# Altium PCB DC-DCBuckConv.PcbDoc (part 1 of 2)
Units mm, origin at the board's own origin, x right, y up, seen from the top; angles counter-clockwise.
Board outline 34.34 x 69.93 mm, 4 copper layers (Top Layer, GND, POWER, Bottom Layer), stack 1.369 mm thick; 52 components, 51 nets, 193 pads, 133 vias.
Unrouted connection lines stored in the file: 1.
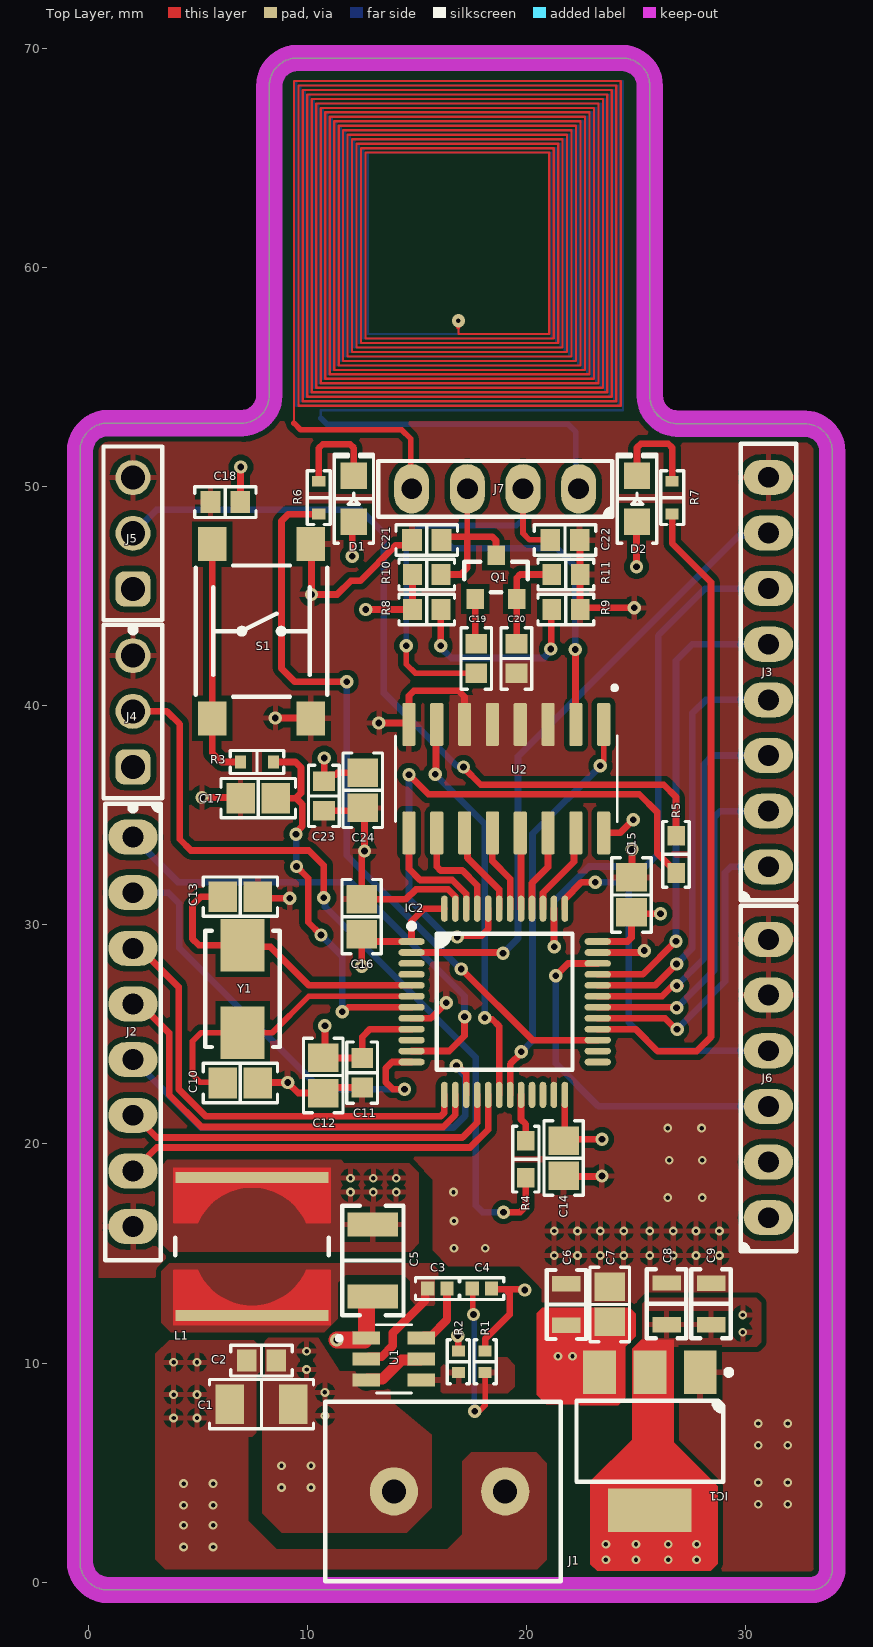
[diagram p0: Top Layer view]
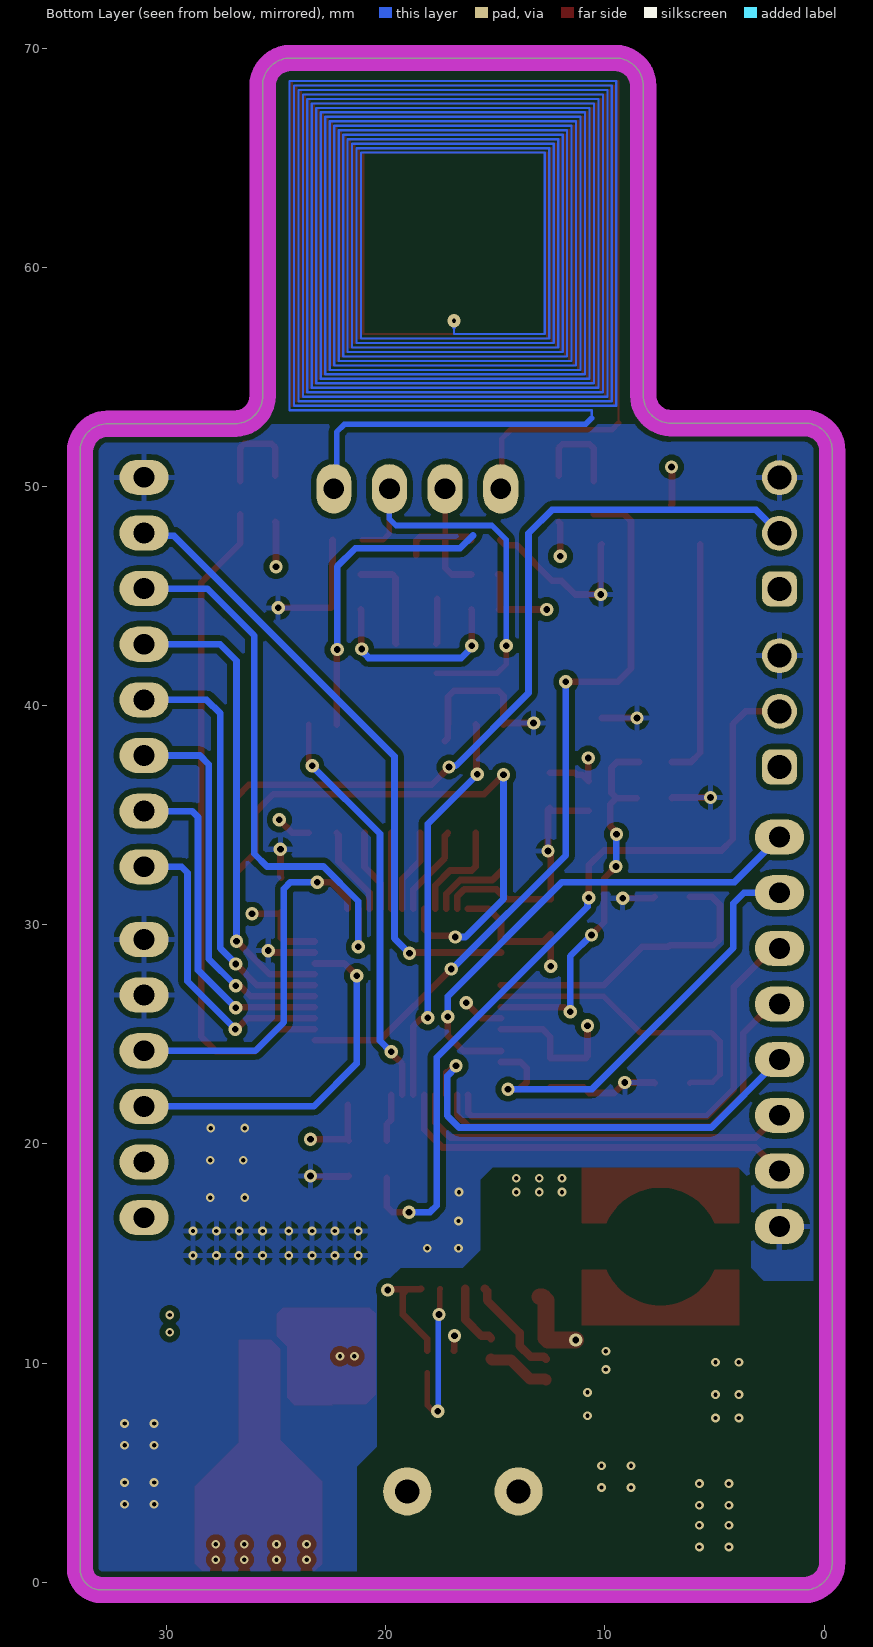
[diagram p1: Bottom Layer view, seen from below]
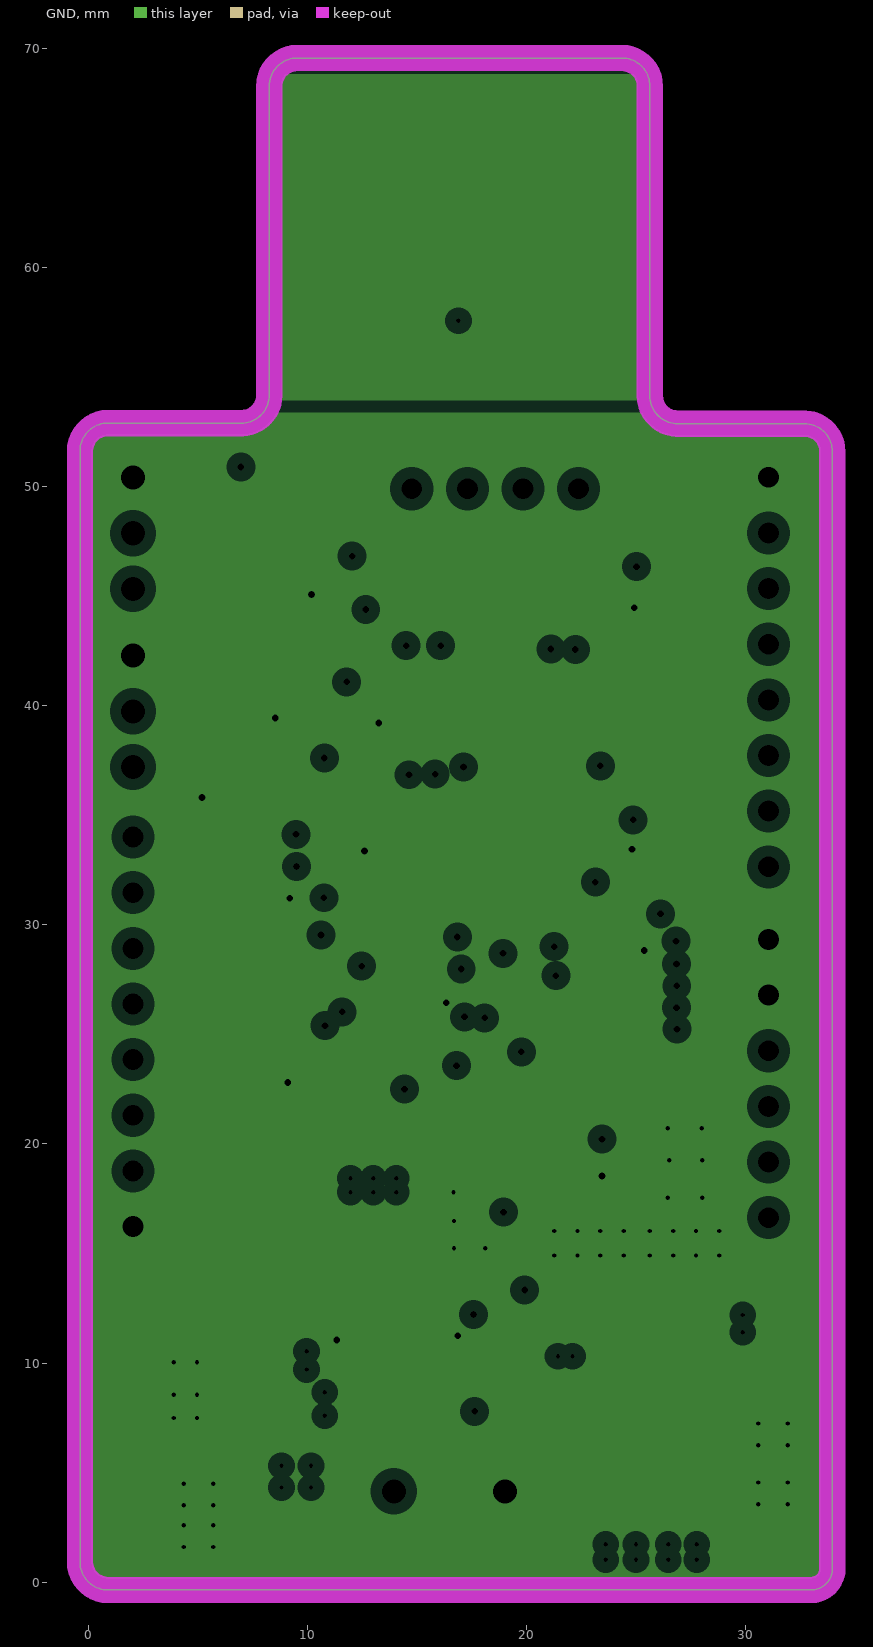
[diagram p2: GND, clearances drawn from the general rule]
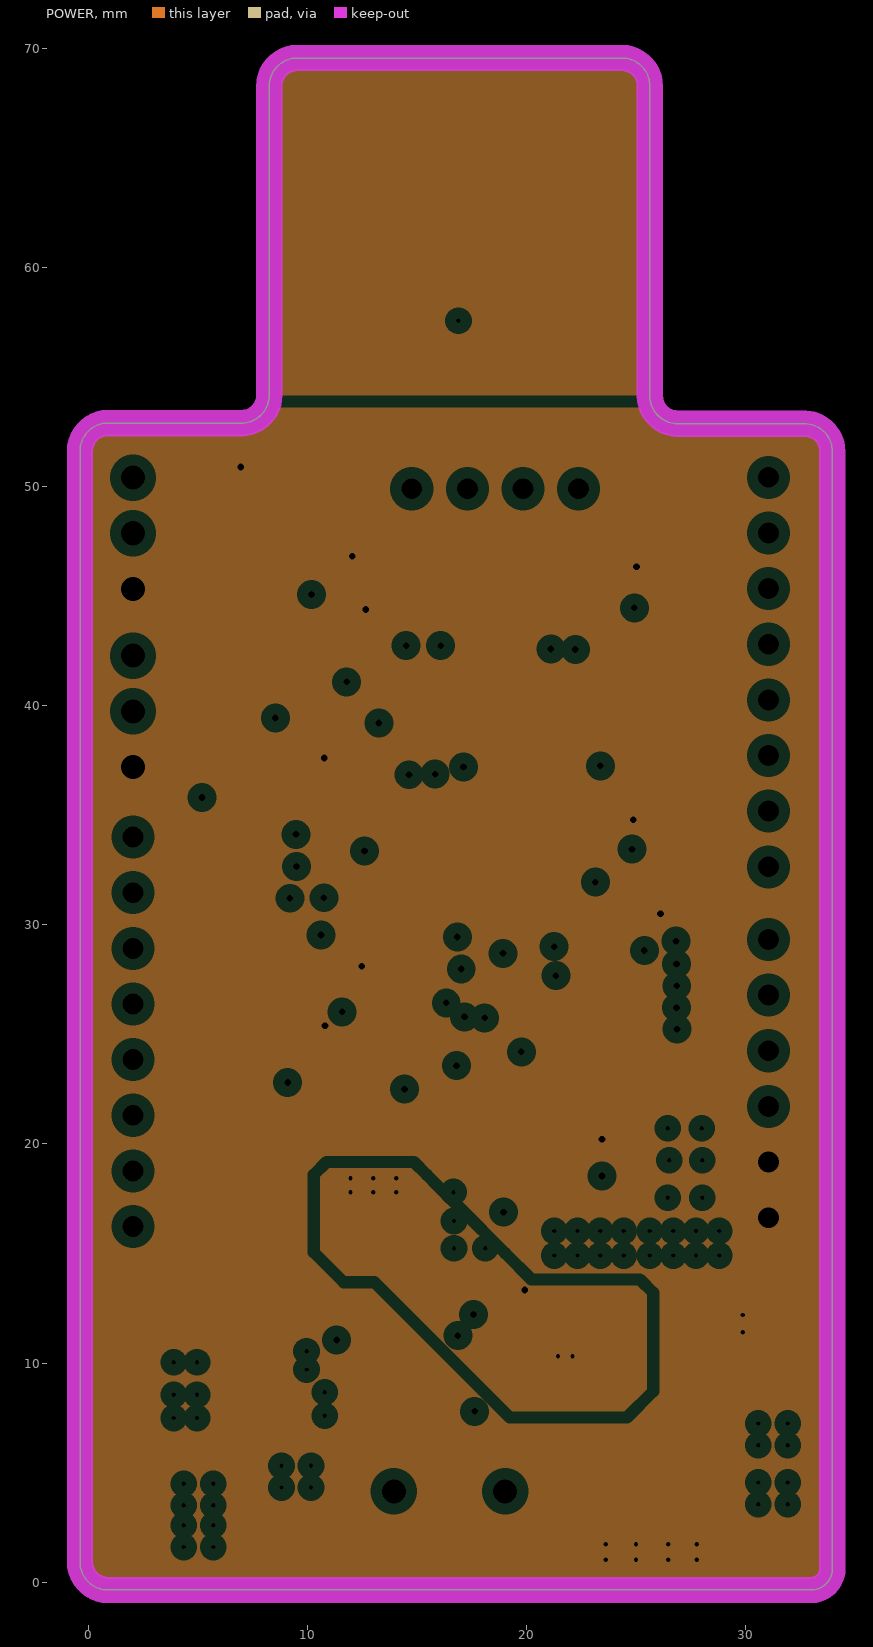
[diagram p3: POWER, clearances drawn from the general rule]

## Layer stack, top to bottom
Top Solder: solder mask 0.0254, SM-001, Dk 4
Top Layer: signal copper 0.035
Dielectric 1: prepreg 0.1295, PP-017, Dk 4.3
Dielectric 2: prepreg 0.1295, PP-017, Dk 4.3
GND: plane copper 0.035, net GND
Dielectric 3: core 0.7112, Core-039, Dk 4.8
POWER: plane copper 0.035, net (Multiple Nets)
Dielectric 4: prepreg 0.1295, PP-017, Dk 4.3
Dielectric 5: prepreg 0.1295, PP-017, Dk 4.3
Bottom Layer: signal copper 0.035
Bottom Solder: solder mask 0.0254, SM-001, Dk 4

## Board outline
-0.381,0.914 -0.381,51.638 cw(c0.889,51.638) 0.889,52.908 6.985,52.908 ccw(c6.985,54.178) 8.255,54.178 8.255,68.301 cw(c9.525,68.301) 9.525,69.571 24.359,69.571 cw(c24.359,68.301) 25.629,68.301 25.629,54.153 ccw(c26.899,54.153) 26.899,52.883 32.69,52.883 cw(c32.69,51.613) 33.96,51.613 33.96,0.61 cw(c32.995,0.61) 32.995,-0.356 0.889,-0.356 cw(c0.889,0.914)

## Design rules (kind name [scope] priority, off if disabled: settings)
Clearance [All] p1: gap=0.254 ignorepadtopadclearanceinfootprint=TRUE except(0: Arc-Hole Track-Hole SMDPad-Hole THPad-Hole Via-Hole Fill-Hole Poly-Hole Region-Hole Text-Hole; 0.127: Arc-Arc Arc-Track Arc-SMDPad Track-Track Track-SMDPad SMDPad-SMDPad Text-Text)
ComponentClearance [All] p1: gap=0.254 collisioncheckmode=3 verticalgap=0.025 showdistances=FALSE
MinimumSolderMaskSliver [All] p1: minsoldermaskwidth=0.12
PlaneClearance [All] p1: clearance=0.508
PlaneConnect [All] p1: planeconnectstyle=Relief reliefexpansion=0.508 reliefentries=4 reliefconductorwidth=0.254 reliefairgap=0.254
PolygonConnect [All] p1: connectstyle=Relief reliefconductorwidth=0.254 reliefentries=4 polygonreliefangle="90 Angle" airgapwidth=0.254
RoutingVias [All] p1: holewidth=0.305 width=0.61 viastyle="Through Hole" minholewidth=0.203 minwidth=0.406 maxholewidth=0.61 maxwidth=1.219
SilkToSilkClearance [All] p1: silktosilkclearance=0.127
SilkToSolderMaskClearance [IsPad] p1: minsilkscreentomaskgap=0.127 clearancetoexposedcopper=TRUE
SolderMaskExpansion [All] p1: expansion=0.102 istentingtop=FALSE
Width [All] p1: maxlimit=0.762 minlimit=0.254 preferedwidth=0.305 minimp=50.000000 maximp=50.000000 favimp=50.000000
24 further rules are at their usual default settings.

## Classes and differential pairs
component class Power: C1 C2 C3 C4 C5 C6 C7 C8 C9 IC1 J1 J2 J3 L1 R1 R2 SS U1
component class Measurement: C19 C20 C21 C22 C23 C24 J7 Q1 R8 R9 R10 R11 SS U2
component class Mcu: C10 C11 C12 C13 C14 C15 C16 C17 C18 D1 D2 IC2 J4 J5 J6 R3 R4 R5 R6 R7 S1 SS Y1

## Components (designator, comment, footprint, x,y, rotation, side; value= is the part's Value field where it differs from the comment)
C1 "2.2 µF" "CAP 1206_3216 - 0.8MM" 7.899,8.128 r0 top
C2 "0.1 µF" "CAP 0603_1608" 7.899,10.109 r0 top
C3 "0.1 µF" "CAP 0402_1005" 15.926,13.399 r0 top
C4 "3.9pF" "CAP 0402_1005" 17.958,13.399 r180 top
C5 "47 µF" "MURATA - GRM32E" 12.979,14.681 r90 top
C6 "10 µF" "MURATA GRM21B 0805_2012" 21.819,12.675 r270 top
C7 "0.1 µF" "CAP 0805_2012" 23.8,12.675 r270 top
C8 "10 µF" "MURATA GRM21B 0805_2012" 26.391,12.702 r270 top
C9 "100 µF" "MURATA GRM21B 0805_2012" 28.423,12.7 r270 top
C10 "20 pF" "CAP 0805_2012" 6.934,22.784 r180 top
C11 "1 µF" "CAP 0603_1608" 12.497,23.254 r90 top
C12 "0.1 µF" "CAP 0805_2012" 10.719,23.127 r90 top
C13 "20 pF" "CAP 0805_2012" 6.934,31.293 r180 top
C14 "0.1 µF" "CAP 0805_2012" 21.692,19.355 r90 top
C15 "0.1 µF" "CAP 0805_2012" 24.79,31.369 r270 top
C16 "0.1 µF" "CAP 0805_2012" 12.471,30.378 r270 top
C17 "0.1 µF" "CAP 0805_2012" 7.747,35.789 r180 top
C18 "1 µF" "CAP 0603_1608" 6.248,49.301 r0 top
C19 "0.1 µF" "CAP 0603_1608" 17.704,42.164 r90 top
C20 "0.1 µF" "CAP 0603_1608" 19.533,42.164 r90 top
C21 "2200pF" "CAP 0603_1608" 15.443,47.574 r0 top
C22 "2200pF" "CAP 0603_1608" 21.753,47.574 r0 top
C23 "1 µF" "CAP 0603_1608" 10.744,35.89 r90 top
C24 "0.1 µF" "CAP 0805_2012" 12.522,36.144 r90 top
D1 "Red" "LED 0805_2012 RED" 12.116,49.454 r90 top
D2 "Green" "LED 0805_2012 RED" 25.044,49.454 r90 top
IC1 "LD1117AS33TR" "ST SOT-223" 25.629,6.426 r270 top
IC2 "STM32F103CBT6" "ST LQFP-48 7X7MM" 18.999,26.492 r0 top
J1 "282837-2" "TE 282837-2" 16.485,4.14 r180 top
J2 "SSW-108-03-T-S" "SAMTEC SSW-108-03-T-S" 2.032,25.121 r270 top
J3 "SSW-108-03-T-S" "SAMTEC SSW-108-03-T-S" 31.039,41.544 r90 top
J4 "61300311121" "WURTH WE-PHD 61300311121" 2.032,39.751 r90 top
J5 "61300311121" "WURTH WE-PHD 61300311121" 2.032,47.879 r90 top
J6 "SSW-106-03-T-S" "SAMTEC SSW-106-03-T-S" 31.039,22.987 r90 top
J7 "SSW-104-03-T-S" "SAMTEC SSW-104-03-T-S" 18.567,49.911 r180 top
L1 "27 µH" "BOURNS SRR6028" 7.468,15.316 r90 top
Q1 "MMBT489LT1G" "ON SEMI SOT-23-3" 18.608,45.882 r90 top
R1 "100 kOhms" "YAGEO RES 0402_1005" 18.11,10.058 r90 top
R2 "13.7 kOhms" "YAGEO RES 0402_1005" 16.891,10.058 r90 top
R3 "390 Ohms" "KOA RES RK73 RN73 0603_1608" 7.696,37.44 r0 top
R4 "10 kOhms" "YAGEO RES 0603_1608" 19.964,19.304 r90 top
R5 "10 kOhms" "YAGEO RES 0603_1608" 26.822,33.223 r270 top
R6 "390 Ohms" "KOA RES RK73 RN73 0603_1608" 10.516,49.505 r90 top
R7 "390 Ohms" "KOA RES RK73 RN73 0603_1608" 26.645,49.505 r90 top
R8 "47.5 kOhms" "RES 0603_1608" 15.443,44.399 r180 top
R9 "10 kOhms" "RES 0603_1608" 21.793,44.399 r180 top
R10 "2.21 Ohms" "RES 0603_1608" 15.443,45.999 r180 top
R11 "475 Ohms" "RES 0603_1608" 21.793,45.999 r180 top
S1 "PTS645SM43SMTR92 LFS" "C&K PTS645" 7.899,43.409 r270 top
U1 "IC REG BUCK ADJ 2A SOT23" "SOT-23-6 Thin" 13.945,10.185 r0 top
U2 "IC COUNTER 4BIT SYNC BIN 16-SOIC" SOIC16 18.948,36.678 r270 top
Y1 "8 MHz" "NDK NX5032GA" 7.036,27.076 r270 top

## Footprints (in the part's own frame and the unit in brackets; to place one, negate y for a bottom-side part, rotate by r counter-clockwise, add the part's x,y. Pads: shape width x height; smd on the part's side, far side on the other; paste and mask are expansions set on the pad)
"BOURNS SRR6028" [mm] "Precision Wire Wound Inductor, 2-Leads, Body 6.80x6.80mm, IPC Medium Density"
  rect 0.5x7 smd: 1(-3.15,0) 2(3.15,0)
  Top Layer region: 3.6,3.6 1.1,3.6 1.1,2.5 1.4,2.4 1.7,2.1 1.9,2 2.1,1.7 2.3,1.4 2.5,1 2.6,0.7 2.7,0.3 2.7,0 3.6,0
  Top Layer region: 3.6,-3.6 1.1,-3.6 1.1,-2.5 1.4,-2.4 1.7,-2.1 1.9,-2 2.1,-1.7 2.3,-1.4 2.5,-1 2.6,-0.7 2.7,-0.3 2.7,0 3.6,0
  Top Layer region: -3.6,-3.6 -1.1,-3.6 -1.1,-2.5 -1.4,-2.4 -1.7,-2.1 -1.9,-2 -2.1,-1.7 -2.3,-1.4 -2.5,-1 -2.6,-0.7 -2.7,-0.3 -2.7,0 -3.6,0
  Top Layer region: -3.6,3.6 -1.1,3.6 -1.1,2.5 -1.4,2.4 -1.7,2.1 -1.9,2 -2.1,1.7 -2.3,1.4 -2.5,1 -2.6,0.7 -2.7,0.3 -2.7,0 -3.6,0
  Top Layer lines w0.1: -1.1,3.55 -1.1,2.5 ; 1.1,3.55 1.1,2.5 ; -1.1,2.5 ccw(c0,0) -2.731,0 ccw(c0,0) -1.1,-2.5 ; 1.1,2.5 cw(c0,0) 2.731,0 cw(c0,0) 1.1,-2.5 ; -1.1,-2.5 -1.1,-3.55 ; 1.1,-2.5 1.1,-3.527 1.1,-3.55
  silkscreen extent -0.4,-3.5 0.4,3.5, body extent -3.4,-3.4 3.4,3.4, height 2.8
"C&K PTS645" [mm] "T-Switch, 4-leads, body 6x6mm, C&K PTS645SM43SMTR92 LFS"
  rect 1.55x1.3 smd mask+0.1: 1(-3.975,2.25) 2(3.975,2.25) 3(-3.975,-2.25) 4(3.975,-2.25)
  silkscreen extent -3,-3 3,3, body extent -4.5,-3 4.5,3, height 4.4
"CAP 0402_1005" [mm] "Chip Capacitor, 2-Leads, Body 1.02x0.51mm, IPC Medium Density"
  rect 0.6x0.64 smd: 1(-0.44,0) 2(0.44,0)
  silkscreen extent -1,-0.5 1,0.5, body extent -0.5,-0.26 0.5,0.26, height 0.52
"CAP 0603_1608" [mm] "Chip Capacitor, 2-Leads, Body 1.60x0.80mm, IPC Medium Density"
  rect 0.9x1 smd: 1(-0.675,0) 2(0.675,0)
  silkscreen extent -1.4,-0.7 1.4,0.7, body extent -0.8,-0.41 0.8,0.41, height 0.82
"CAP 0805_2012" [mm] "Chip Capacitor, 2-Leads, Body 2.00x1.20mm, IPC Medium Density"
  rect 1.3x1.4 smd: 1(-0.8,0) 2(0.8,0)
  silkscreen extent -1.7,-0.9 1.7,0.9, body extent -1,-0.64 1,0.64, height 1.26
"CAP 1206_3216 - 0.8MM" [mm] "Chip Capacitor, 2-Leads, Body 3.25x1.60mm, IPC Medium Density"
  rect 1.3x1.8 smd: 1(-1.45,0) 2(1.45,0)
  silkscreen extent -2.37,-1.12 2.37,1.12, body extent -1.6,-0.8 1.6,0.8, height 0.8
"KOA RES RK73 RN73 0603_1608" [mm] "Chip Resistor, 2-Leads, Body 1.60x0.80mm"
  rect 0.5x0.6 smd: 1(-0.75,0) 2(0.75,0)
  silkscreen extent -1.22,-0.52 1.22,0.52, body extent -0.8,-0.4 0.8,0.4, height 0.45
"LED 0805_2012 RED" [mm] "Chip Diode, 2-Leads, Body 2.00x1.25mm, IPC Medium Density"
  rect 1.2x1.2 smd: 1(-1.05,0) 2(1.05,0)
  silkscreen extent -2.03,-0.9 2.03,0.9, body extent -1,-0.62 1,0.63, height 0.9
"MURATA - GRM32E" [mm] "Chip Capacitor, 2-Leads, Body 3.20x2.50mm"
  rect 1.1x2.3 smd: 1(-1.65,0) 2(1.65,0)
  silkscreen extent -2.5,-1.4 2.5,1.4, body extent -1.6,-1.25 1.6,1.25, height 2.5
"MURATA GRM21B 0805_2012" [mm] "Chip Capacitor, 2-Leads, Body 2.00x1.25mm"
  rect 0.7x1.3 smd: 1(-0.95,0) 2(0.95,0)
  silkscreen extent -1.58,-0.9 1.58,0.9, body extent -1,-0.63 1,0.63, height 1.25
"NDK NX5032GA" [mm] "Crystal, 2-Leads, Body 5.00x3.20mm, IPC Medium Density"
  rect 2.4x2 smd: 1(-2,0) 2(2,0)
  silkscreen extent -2.65,-1.7 2.65,1.7, body extent -2.5,-1.6 2.5,1.6, height 1.2
"ON SEMI SOT-23-3" [mm] "SOT23, 3-Leads, Body 2.90x2.40mm, Pitch 0.95mm, IPC Medium Density"
  rect 0.9x0.8 smd: 1(-1,0.95) 2(-1,-0.95) 3(1,0)
  silkscreen extent -0.7,-1.45 0.7,1.45, body extent -1.16,-1.45 1.16,1.45, height 1
"RES 0603_1608" [mm] "Chip Resistor, 2-Leads, Body 1.60x0.80mm, IPC Medium Density"
  rect 0.85x0.95 smd: 1(-0.65,0) 2(0.65,0)
  silkscreen extent -1.27,-0.7 1.27,0.7, body extent -0.8,-0.4 0.8,0.4, height 0.45
"SAMTEC SSW-104-03-T-S" [mm] "Pin Header, pitch 2.54 mm, THT, Vertical, single row, 3p"
  oval 1.6x2.25 hole 0.95: 1(-3.81,0) 2(-1.27,0) 3(1.27,0) 4(3.81,0)
  silkscreen extent -5.34,-1.27 5.34,1.27, body extent -5.33,-1.21 5.33,1.21, height 8.51
"SAMTEC SSW-106-03-T-S" [mm]
  oval 1.6x2.25 hole 0.95: 1(-6.35,0) 2(-3.81,0) 3(-1.27,0) 4(1.27,0) 5(3.81,0) 6(6.35,0)
  silkscreen extent -7.88,-1.27 7.88,1.27, body extent -7.87,-1.21 7.87,1.21, height 8.51
"SAMTEC SSW-108-03-T-S" [mm]
  oval 1.6x2.25 hole 0.95: 1(-8.89,0) 2(-6.35,0) 3(-3.81,0) 4(-1.27,0) 5(1.27,0) 6(3.81,0) 7(6.35,0) 8(8.89,0)
  silkscreen extent -10.42,-1.27 10.42,1.27, body extent -10.41,-1.21 10.41,1.21, height 8.51
SOIC16 [mm]
  rrect25% 1.97x0.6 smd: 1(-2.475,4.572) 2(-2.475,3.302) 3(-2.475,2.032) 4(-2.475,0.762) 5(-2.475,-0.508) 6(-2.475,-1.778) 7(-2.475,-3.048) 8(-2.475,-4.318) 9(2.475,-4.318) 10(2.475,-3.048) 11(2.475,-1.778) 12(2.475,-0.508) 13(2.475,0.762) 14(2.475,2.032) 15(2.475,3.302) 16(2.475,4.572)
  silkscreen extent -4.24,-4.94 1.95,5.19, body extent -3,-4.83 3,5.07, height 1.75
"SOT-23-6 Thin" [mm]
  rect 1.25x0.59 smd: 1(-1.255,0.95) 2(-1.255,0) 3(-1.255,-0.95) 4(1.255,-0.95) 5(1.255,0) 6(1.255,0.95)
  silkscreen extent -2.6,-1.56 0.8,1.56, body extent -1.4,-1.45 1.4,1.45, height 1.1
"ST LQFP-48 7X7MM" [mm] "LQFP, 48-Leads, Body 7.00x7.00mm, Pitch 0.50mm, IPC Medium Density"
  oval 1.2x0.3 smd: 1(-4.25,2.75) 2(-4.25,2.25) 3(-4.25,1.75) 4(-4.25,1.25) 5(-4.25,0.75) 6(-4.25,0.25) 7(-4.25,-0.25) 8(-4.25,-0.75) 9(-4.25,-1.25) 10(-4.25,-1.75) 11(-4.25,-2.25) 12(-4.25,-2.75) 25(4.25,-2.75) 26(4.25,-2.25) 27(4.25,-1.75) 28(4.25,-1.25) 29(4.25,-0.75) 30(4.25,-0.25) 31(4.25,0.25) 32(4.25,0.75) 33(4.25,1.25) 34(4.25,1.75) 35(4.25,2.25) 36(4.25,2.75)
  oval 0.3x1.2 smd: 13(-2.75,-4.25) 14(-2.25,-4.25) 15(-1.75,-4.25) 16(-1.25,-4.25) 17(-0.75,-4.25) 18(-0.25,-4.25) 19(0.25,-4.25) 20(0.75,-4.25) 21(1.25,-4.25) 22(1.75,-4.25) 23(2.25,-4.25) 24(2.75,-4.25) 37(2.75,4.25) 38(2.25,4.25) 39(1.75,4.25) 40(1.25,4.25) 41(0.75,4.25) 42(0.25,4.25) 43(-0.25,4.25) 44(-0.75,4.25) 45(-1.25,4.25) 46(-1.75,4.25) 47(-2.25,4.25) 48(-2.75,4.25)
  silkscreen extent -4.37,-3.1 3.1,3.57, body extent -4.51,-4.51 4.51,4.51, height 1.55
"ST SOT-223" [mm] "SOT223, 4-Leads, Body 6.50x7.00mm (avg), Pitch 2.30mm, IPC Medium Density"
  rect 2x1.5 smd: 1(-3.15,2.3) 2(-3.15,0) 3(-3.15,-2.3)
  rect 2x3.8 smd: 4(3.15,0)
  silkscreen extent -3.27,-3.35 1.85,3.73, body extent -3.52,-3.25 3.5,3.25, height 1.8
"TE 282837-2" [mm] "Wire to Board Terminal Block Horizontal with Board, 2 Postions, Body 10.76x8.2 mm, Pitch 5.08mm"
  round 2.2 hole 1.1: 1(-2.54,0) 2(2.54,0)
  silkscreen extent -5.08,-4.1 5.68,4.1, body extent -5.08,-4.1 5.68,4.1, height 10.3
"WURTH WE-PHD 61300311121" [mm] "Pin Header, pitch 2.54 mm, THT, Vertical, single row, 3p"
  rrect50% 1.6x1.6 hole 1.1: 1(-2.54,0)
  round 1.6 hole 1.1: 2(0,0) 3(2.54,0)
  silkscreen extent -4.53,-1.35 3.96,1.35, body extent -3.81,-1.27 3.81,1.27, height 8.57
"YAGEO RES 0402_1005" [mm] "Chip Resistor, 2-Leads, Body 1.0x0.5mm"
  rect 0.5x0.6 smd: 1(-0.5,0) 2(0.5,0)
  silkscreen extent -1,-0.51 1,0.51, body extent -0.5,-0.25 0.5,0.25, height 0.35
"YAGEO RES 0603_1608" [mm] "Chip Resistor, 2-Leads, Body 1.60x0.80mm"
  rect 0.9x0.8 smd: 1(-0.85,0) 2(0.85,0)
  silkscreen extent -1.5,-0.6 1.5,0.6, body extent -0.8,-0.4 0.8,0.4, height 0.45

## Part data
C1: library part CL31B225KBHVPNE, "CAP CER 2.2UF 50V X7R 1206", Device Package="1206 (3216 Metric)", manufacturer="Samsung Electro-Mechanics", Operating Temperature="-55°C ~ 125°C", Ratings=AEC-Q200, Supplier Part Number 1=1276-6735-1-ND, Temperature Coefficient=X7R, Tolerance=±10%, Voltage - Rated=50V, Applications=Automotive, Capacitance="2.2 µF", componentlink1description=Datasheet, componentlink1url=http://www.samsungsem.com/kr/support/product-search/mlcc/CL31B225KBHVPNE.jsp, componentlink2description="DigiKey Link", componentlink2url=https://www.digikey.com/en/products/detail/samsung-electro-mechanics/CL31B225KBHVPNE/5961219, lastupdated="4.06.2024 19:10:40", Lifecycle Status=Active, Minimum Order=1, Mounting Type="Surface Mount, MLCC", Package / Case="1206 (3216 Metric)", packaging=TapeAndReel, Part Number=CL31B225KBHVPNE, Part Status=Active, partid=20106, price=0.05, series=CL, Size / Dimension="0.126\" L x 0.063\" W (3.20mm x 1.60mm)", Supplier 1=DigiKey, Thickness (Max)="0.071\" (1.80mm)"
C2: library part C0603X104K5RAC3316, "CAP CER 0603 0.1UF 50V X7R 10%", Device Package="0603 (1608 Metric)", manufacturer=KEMET, Operating Temperature="-55°C ~ 125°C", Ratings=AEC-Q200, Supplier Part Number 1=399-C0603X104K5RAC3316CT-ND, Temperature Coefficient=X7R, Tolerance=±10%, Voltage - Rated=50V, Applications="Automotive, Boardflex Sensitive", Capacitance="0.1 µF", componentlink1description=Datasheet, componentlink1url=https://api.kemet.com/component-edge/download/datasheet/C0603X104K5RAC3316.pdf, componentlink2description="DigiKey Link", componentlink2url=https://www.digikey.com/en/products/detail/kemet/C0603X104K5RAC3316/10315788, Features="Soft Termination", lastupdated="9.02.2024 20:10:19", Lifecycle Status=Active, Minimum Order=1, Mounting Type="Surface Mount, MLCC", Package / Case="0603 (1608 Metric)", packaging=TapeAndReel, Part Number=C0603X104K5RAC3316, Part Status=Active, partid=11116, price=0.02, series="SMD Auto X7R VW80808", Size / Dimension="0.063\" L x 0.031\" W (1.60mm x 0.80mm)", Supplier 1=DigiKey, Thickness (Max)="0.037\" (0.95mm)"
C3: library part C0402C104K4RECAUTO, "CAP CER 0402 0.1UF 16V X7R 10%", Device Package="0402 (1005 Metric)", manufacturer=KEMET, Operating Temperature="-55°C ~ 125°C", Ratings=AEC-Q200, Supplier Part Number 1=399-17167-1-ND, Temperature Coefficient=X7R, Tolerance=±10%, Voltage - Rated=16V, Applications="Automotive, ESD Protection", Capacitance="0.1 µF", componentlink1description=Datasheet, componentlink1url=https://api.kemet.com/component-edge/download/datasheet/C0402C104K4RECAUTO.pdf, componentlink2description="DigiKey Link", componentlink2url=https://www.digikey.com/en/products/detail/kemet/C0402C104K4RECAUTO/8563695, lastupdated="9.02.2024 20:04:38", Lifecycle Status=Active, Minimum Order=1, Mounting Type="Surface Mount, MLCC", Package / Case="0402 (1005 Metric)", packaging=TapeAndReel, Part Number=C0402C104K4RECAUTO, Part Status=Active, partid=1731, price=0.01, series="ESD SMD Auto X7R", Size / Dimension="0.039\" L x 0.020\" W (1.00mm x 0.50mm)", Supplier 1=DigiKey, Thickness (Max)="0.022\" (0.55mm)"
C4: library part 04023U3R9BAT2A, "CAP CER 3.9PF 25V NP0 0402", Device Package="0402 (1005 Metric)", manufacturer="AVX Corporation", Operating Temperature="-55°C ~ 125°C", Supplier Part Number 1=478-11759-1-ND, Temperature Coefficient="C0G, NP0", Tolerance=±0.1pF, Voltage - Rated=25V, Applications="RF, Microwave, High Frequency", Capacitance=3.9pF, componentlink1description=Datasheet, componentlink1url=http://datasheets.avx.com/U-Series.pdf, componentlink2description="DigiKey Link", componentlink2url=http://digikey.com/product-detail/en/avx-corporation/04023U3R9BAT2A/478-11759-1-ND/8573395, Features="Ultra Low ESR", lastupdated="8.02.2022 12:26:42", Lifecycle Status=Active, Minimum Order=1, Mounting Type="Surface Mount, MLCC", Package / Case="0402 (1005 Metric)", packaging=TapeAndReel, Part Number=04023U3R9BAT2A, Part Status=Active, partid=11132, price=0.03, series=U, Size / Dimension="0.039\" L x 0.020\" W (1.00mm x 0.50mm)", Supplier 1=DigiKey, Thickness (Max)="0.022\" (0.55mm)"
C5: library part GRM32EC81C476KE15L, "CAP CER 47UF 16V X6S 1210", Device Package="1210 (3225 Metric)", manufacturer="Murata Electronics", Operating Temperature="-55°C ~ 105°C", Supplier Part Number 1=490-10531-1-ND, Temperature Coefficient=X6S, Tolerance=±10%, Voltage - Rated=16V, Applications="General Purpose", Capacitance="47 µF", componentlink1description=Datasheet, componentlink1url=https://search.murata.co.jp/Ceramy/image/img/A01X/G101/ENG/GRM32EC81C476KE15-01.pdf, componentlink2description="DigiKey Link", componentlink2url=https://www.digikey.com/en/products/detail/murata-electronics/GRM32EC81C476KE15L/5027615, lastupdated="27.08.2024 14:53:22", Lifecycle Status=Active, Minimum Order=1, Mounting Type="Surface Mount, MLCC", Package / Case="1210 (3225 Metric)", packaging=TapeAndReel, Part Number=GRM32EC81C476KE15L, Part Status=Active, partid=23627, price=0.12, series=GRM, Size / Dimension="0.126\" L x 0.098\" W (3.20mm x 2.50mm)", Supplier 1=DigiKey, Thickness (Max)="0.106\" (2.70mm)"
C6 C8: library part GRM21BR61H106KE43L, "CAP CER 10UF 50V X5R 0805", Device Package="0805 (2012 Metric)", manufacturer="Murata Electronics", Operating Temperature="-55°C ~ 85°C", Supplier Part Number 1=490-18663-1-ND, Temperature Coefficient=X5R, Tolerance=±10%, Voltage - Rated=50V, Applications="Mobile Devices Only", Capacitance="10 µF", componentlink1description=Datasheet, componentlink1url=https://search.murata.co.jp/Ceramy/image/img/A01X/G101/ENG/GRM21BR61H106KE43-01A.pdf, componentlink2description="DigiKey Link", componentlink2url=https://www.digikey.com/en/products/detail/murata-electronics/GRM21BR61H106KE43L/10326316, lastupdated="27.08.2024 09:29:56", Lifecycle Status=Active, Minimum Order=1, Mounting Type="Surface Mount, MLCC", Package / Case="0805 (2012 Metric)", packaging=TapeAndReel, Part Number=GRM21BR61H106KE43L, Part Status=Active, partid=39284, price=0.05, series=GRM, Size / Dimension="0.079\" L x 0.049\" W (2.00mm x 1.25mm)", Supplier 1=DigiKey, Thickness (Max)="0.057\" (1.45mm)"
C7 C12 C14 C15 C16 C17 C24: library part C0805C104J1RECAUTO, "CAP CER 0805 0.1UF 100V X7R 5%", Device Package="0805 (2012 Metric)", manufacturer=KEMET, Operating Temperature="-55°C ~ 125°C", Ratings=AEC-Q200, Supplier Part Number 1=399-C0805C104J1RECAUTOCT-ND, Temperature Coefficient=X7R, Tolerance=±5%, Voltage - Rated=100V, Applications="Automotive, ESD Protection", Capacitance="0.1 µF", componentlink1description=Datasheet, componentlink1url=https://api.kemet.com/component-edge/download/datasheet/C0805C104J1RECAUTO.pdf, componentlink2description="DigiKey Link", componentlink2url=https://www.digikey.com/en/products/detail/kemet/C0805C104J1RECAUTO/8646637, lastupdated="9.02.2024 20:15:06", Lifecycle Status=Active, Minimum Order=1, Mounting Type="Surface Mount, MLCC", Package / Case="0805 (2012 Metric)", packaging=TapeAndReel, Part Number=C0805C104J1RECAUTO, Part Status=Active, partid=31979, price=0.05, series="ESD SMD Auto X7R", Size / Dimension="0.079\" L x 0.049\" W (2.00mm x 1.25mm)", Supplier 1=DigiKey, Thickness (Max)="0.043\" (1.10mm)"
C9: library part GRM21BR60J107ME15K, "CAP CER 100UF 6.3V X5R 0805", Device Package="0805 (2012 Metric)", manufacturer="Murata Electronics", Operating Temperature="-55°C ~ 85°C", Supplier Part Number 1=490-GRM21BR60J107ME15KCT-ND, Temperature Coefficient=X5R, Tolerance=±20%, Voltage - Rated=6.3V, Applications="General Purpose", Capacitance="100 µF", componentlink1description=Datasheet, componentlink1url=https://search.murata.co.jp/Ceramy/image/img/A01X/G101/ENG/GRM21BR60J107ME15-01A.pdf, componentlink2description="DigiKey Link", componentlink2url=https://www.digikey.com/en/products/detail/murata-electronics/GRM21BR60J107ME15K/9887675, lastupdated="27.08.2024 09:29:54", Lifecycle Status=Active, Minimum Order=1, Mounting Type="Surface Mount, MLCC", Package / Case="0805 (2012 Metric)", packaging=TapeAndReel, Part Number=GRM21BR60J107ME15K, Part Status=Active, partid=39832, price=0.39, series=GRM, Size / Dimension="0.079\" L x 0.049\" W (2.00mm x 1.25mm)", Supplier 1=DigiKey, Thickness (Max)="0.057\" (1.45mm)"
C10 C13: library part C0805C200F5GAC7800, "CAP CER SMD 0805 20PF 50V 1% COG", Device Package="0805 (2012 Metric)", manufacturer=KEMET, Operating Temperature="-55°C ~ 125°C", Supplier Part Number 1=399-17623-1-ND, Temperature Coefficient="C0G, NP0", Tolerance=±1%, Voltage - Rated=50V, Applications="General Purpose", Capacitance="20 pF", componentlink1description=Datasheet, componentlink1url=https://api.kemet.com/component-edge/download/datasheet/C0805C200F5GAC7800.pdf, componentlink2description="DigiKey Link", componentlink2url=https://www.digikey.com/en/products/detail/kemet/C0805C200F5GAC7800/8572458, Features="Low ESL", lastupdated="9.02.2024 20:15:38", Lifecycle Status=Active, Minimum Order=1, Mounting Type="Surface Mount, MLCC", Package / Case="0805 (2012 Metric)", packaging=TapeAndReel, Part Number=C0805C200F5GAC7800, Part Status=Active, partid=13880, price=0.32, series="SMD Comm C0G", Size / Dimension="0.079\" L x 0.049\" W (2.00mm x 1.25mm)", Supplier 1=DigiKey, Thickness (Max)="0.035\" (0.88mm)"
C11 C18 C23: library part C0603X105M4RAC7867, "CAP CER 0603 1UF 16V X7R 20%", Device Package="0603 (1608 Metric)", manufacturer=KEMET, Operating Temperature="-55°C ~ 125°C", Supplier Part Number 1=399-17716-1-ND, Temperature Coefficient=X7R, Tolerance=±20%, Voltage - Rated=16V, Applications="Boardflex Sensitive", Capacitance="1 µF", componentlink1description=Datasheet, componentlink1url=https://api.kemet.com/component-edge/download/datasheet/C0603X105M4RAC7867.pdf, componentlink2description="DigiKey Link", componentlink2url=https://www.digikey.com/en/products/detail/kemet/C0603X105M4RAC7867/8635843, Features="Soft Termination", lastupdated="9.02.2024 20:10:28", Lifecycle Status=Active, Minimum Order=1, Mounting Type="Surface Mount, MLCC", Package / Case="0603 (1608 Metric)", packaging=TapeAndReel, Part Number=C0603X105M4RAC7867, Part Status=Active, partid=3937, price=0.05, series="SMD Comm X7R Flex", Size / Dimension="0.063\" L x 0.031\" W (1.60mm x 0.80mm)", Supplier 1=DigiKey, Thickness (Max)="0.037\" (0.95mm)"
C19 C20: library part CML0603Y5V104ZT50V, "CAP, Y5V, 0603, 0.1UF, +80/-20%,", Device Package="0603 (1608 Metric)", manufacturer="Stackpole Electronics Inc", Operating Temperature="-30°C ~ 85°C", Supplier Part Number 1=738-CML0603Y5V104ZT50VCT-ND, Temperature Coefficient="Y5V (F)", Tolerance="-20%, +80%", Voltage - Rated=50V, Applications="General Purpose", Capacitance="0.1 µF", componentlink1description=Datasheet, componentlink1url=http://www.seielect.com/Catalog/SEI-CML.PDF, componentlink2description="DigiKey Link", componentlink2url=https://www.digikey.com/en/products/detail/stackpole-electronics-inc/CML0603Y5V104ZT50V/10660018, lastupdated="9.02.2024 20:10:13", Lifecycle Status=Active, Minimum Order=1, Mounting Type="Surface Mount, MLCC", Package / Case="0603 (1608 Metric)", packaging=TapeAndReel, Part Number=CML0603Y5V104ZT50V, Part Status=Active, partid=26307, price=0.01, series=CML, Size / Dimension="0.063\" L x 0.031\" W (1.60mm x 0.80mm)", Supplier 1=DigiKey, Thickness (Max)="0.035\" (0.89mm)"
C21 C22: library part 06031C222KAT4A, "CAP CER 2200PF 100V X7R 0603", Device Package="0603 (1608 Metric)", manufacturer="AVX Corporation", Operating Temperature="-55°C ~ 125°C", Supplier Part Number 1=478-12673-1-ND, Temperature Coefficient=X7R, Tolerance=±10%, Voltage - Rated=100V, Applications="General Purpose", Capacitance=2200pF, componentlink1description=Datasheet, componentlink1url=http://datasheets.avx.com/X7RDielectric.pdf, componentlink2description="DigiKey Link", componentlink2url=http://digikey.com/product-detail/en/avx-corporation/06031C222KAT4A/478-12673-1-ND/9949211, lastupdated="2.09.2020 01:03:32", Lifecycle Status=Active, Minimum Order=1, Mounting Type="Surface Mount, MLCC", Package / Case="0603 (1608 Metric)", packaging=TapeAndReel, Part Number=06031C222KAT4A, Part Status=Active, partid=4525, price=0.02, series=-, Size / Dimension="0.063\" L x 0.032\" W (1.60mm x 0.81mm)", Supplier 1=DigiKey, Thickness (Max)="0.035\" (0.90mm)"
D1: library part CMD17-21SRC/TR8, "LED RED CLEAR 0805 SMD", Current - Test=20mA, Device Package="0805 (2012 Metric)", Lens Color=Colorless, manufacturer="Visual Communications Company - VCC", Millicandela Rating=21mcd, Supplier Device Package=0805, Supplier Part Number 1=L62411CT-ND, Voltage - Forward (Vf) (Typ)=1.7V, Color=Red, componentlink1description=Datasheet, componentlink1url=https://vcclite.com/wp-content/uploads/wpallimport/files/files/CMD1721Seriesver3.pdf, componentlink2description="DigiKey Link", componentlink2url=https://www.digikey.com/en/products/detail/visual-communications-company-vcc/CMD17-21SRC-TR8/254848, Configuration=Standard, Height (Max)=1.20mm, lastupdated="3.06.2024 20:00:06", Lens Size="1.40mm x 1.25mm", Lens Style="Rectangle with Flat Top", Lens Transparency=Clear, Lifecycle Status=Active, Minimum Order=1, Mounting Type="Surface Mount", Package / Case="0805 (2012 Metric)", packaging=TapeAndReel, Part Number=CMD17-21SRC/TR8, Part Status=Active, partid=369, price=0.30, series=CMD17-21, Size / Dimension="2.00mm L x 1.25mm W", Supplier 1=DigiKey, Viewing Angle=140°, Wavelength - Peak=660nm
D2: library part CMD17-21SRC/TR8, "LED RED CLEAR 0805 SMD", Color=Red, Current - Test=20mA, Device Package="0805 (2012 Metric)", Lens Color=Colorless, manufacturer="Visual Communications Company - VCC", Millicandela Rating=21mcd, Supplier Device Package=0805, Supplier Part Number 1=L62411CT-ND, Voltage - Forward (Vf) (Typ)=1.7V, componentlink1description=Datasheet, componentlink1url=https://vcclite.com/wp-content/uploads/wpallimport/files/files/CMD1721Seriesver3.pdf, componentlink2description="DigiKey Link", componentlink2url=https://www.digikey.com/en/products/detail/visual-communications-company-vcc/CMD17-21SRC-TR8/254848, Configuration=Standard, Height (Max)=1.20mm, lastupdated="3.06.2024 20:00:06", Lens Size="1.40mm x 1.25mm", Lens Style="Rectangle with Flat Top", Lens Transparency=Clear, Lifecycle Status=Active, Minimum Order=1, Mounting Type="Surface Mount", Package / Case="0805 (2012 Metric)", packaging=TapeAndReel, Part Number=CMD17-21SRC/TR8, Part Status=Active, partid=369, price=0.30, series=CMD17-21, Size / Dimension="2.00mm L x 1.25mm W", Supplier 1=DigiKey, Viewing Angle=140°, Wavelength - Peak=660nm
IC1: "IC REG LINEAR 3.3V 1A SOT223", Current - Output=1A, Current - Quiescent (Iq)="10 mA", manufacturer=STMicroelectronics, Operating Temperature="0°C ~ 125°C", Package / Case="TO-261-4, TO-261AA", Supplier Device Package=SOT-223, Supplier Part Number 1=497-1228-1-ND, Voltage - Output (Min/Fixed)=3.3V, Voltage - Input (Max)=15V, Voltage Dropout (Max)="1.3V @ 1A", componentlink1description=Datasheet, componentlink1url=http://www.st.com/content/ccc/resource/technical/document/datasheet/a5/c3/3f/c9/2b/15/40/49/CD00002116.pdf/files/CD00002116.pdf/jcr:content/translations/en.CD00002116.pdf, componentlink2description="DigiKey Link", componentlink2url=https://www.digikey.com/en/products/detail/stmicroelectronics/LD1117AS33TR/585752, lastupdated="3.06.2024 20:14:21", Lifecycle Status=Active, Minimum Order=1, Mounting Type="Surface Mount", Number of Regulators=1, Output Configuration=Positive, Output Type=Fixed, packaging=TapeAndReel, Part Number=LD1117AS33TR, Part Status=Active, price=0.32, Protection Features="Over Current, Over Temperature", PSRR="75dB (120Hz)", series=-, Supplier 1=DigiKey
IC2: "IC MCU 32BIT 128KB FLASH 48LQFP", Device Package=48-LQFP, manufacturer=STMicroelectronics, Operating Temperature="-40°C ~ 85°C (TA)", Supplier Part Number 1=497-6288-ND, Voltage - Supply (Vcc/Vdd)="2V ~ 3.6V", componentlink1description=Datasheet, componentlink1url=https://www.st.com/resource/en/datasheet/stm32f103cb.pdf, componentlink2description="DigiKey Link", componentlink2url=http://digikey.com/product-detail/en/stmicroelectronics/STM32F103CBT6/497-6288-ND/1754420, Connectivity="CANbus, I²C, IrDA, LINbus, SPI, UART/USART, USB", Core Processor="ARM® Cortex®-M3", Core Size=32-Bit, Data Converters="A/D 10x12b", lastupdated="24.05.2020 22:49:18", Lifecycle Status=Active, Minimum Order=1, Mounting Type="Surface Mount", Number of I/O=37, Oscillator Type=Internal, Package / Case=48-LQFP, packaging=Tray, Part Number=STM32F103CBT6, Part Status=Active, partid=194, Peripherals="DMA, Motor Control PWM, PDR, POR, PVD, PWM, Temp Sensor, WDT", price=5.25, Program Memory Size="128KB (128K x 8)", Program Memory Type=FLASH, RAM Size="20K x 8", series=STM32F1, Speed=72MHz, Supplier 1=DigiKey
J1: "TERM BLK 2P SIDE ENT 5.08MM PCB", Color=Green, Current="13.5 A", manufacturer="TE Connectivity AMP Connectors", Supplier Part Number 1=A113320-ND, Voltage="300 V", componentlink1description=Datasheet, componentlink1url=https://www.te.com/commerce/DocumentDelivery/DDEController?Action=srchrtrv&DocNm=282837&DocType=Customer+Drawing&DocLang=English, componentlink2description="DigiKey Link", componentlink2url=https://www.digikey.com/en/products/detail/te-connectivity-amp-connectors/282837-2/2187973, Features="Interlocking (Side)", lastupdated="21.06.2022 15:00:23", Lifecycle Status=Active, Mating Orientation="Horizontal with Board", Minimum Order=1, Mounting Type="Through Hole", Number of Levels=1, packaging=Tray, Part Number=282837-2, Part Status=Active, Pitch="0.200\" (5.08mm)", Positions Per Level=2, price=0.31, series=Buchanan, Supplier 1=DigiKey, Wire Gauge="16-28 AWG", Wire Termination="Screw - Rising Cage Clamp"
J2 J3: "CONN RCPT 8POS 0.1 TIN PCB", Current Rating (Amps)="5.7A per Contact", manufacturer="Samtec Inc.", Material Flammability Rating="UL94 V-0", Operating Temperature="-55°C ~ 105°C", Supplier Part Number 1=SAM8866-ND, Insulation Color=Black, componentlink1description=Datasheet, componentlink1url=http://suddendocs.samtec.com/catalog_english/ssw_th.pdf, componentlink2description="DigiKey Link", componentlink2url=https://www.digikey.com/en/products/detail/samtec-inc/SSW-108-03-T-S/1790200, Connector Type=Receptacle, Contact Finish - Mating=Tin, Contact Finish - Post=Tin, Contact Length - Post="0.394\" (10.00mm)", Contact Type=Forked, Fastening Type=Push-Pull, lastupdated="21.06.2022 15:09:52", Lifecycle Status=Active, Minimum Order=1, Mounting Type="Through Hole", Number of Positions=8, Number of Positions Loaded=All, Number of Rows=1, packaging=Bulk, Part Number=SSW-108-03-T-S, Part Status=Active, Pitch - Mating="0.100\" (2.54mm)", price=0.73, series=SSW, Style="Board to Board or Cable", Supplier 1=DigiKey, Termination=Solder, Insulation Height="0.335\" (8.51mm)"
J4 J5: "CONN HEADER VERT 3POS 2.54MM", Current Rating (Amps)=3A, manufacturer="Würth Elektronik", Material Flammability Rating="UL94 V-0", Operating Temperature="-40°C ~ 105°C", Supplier Part Number 1=732-5316-ND, Insulation Color=Black, componentlink1description=Datasheet, componentlink1url=https://katalog.we-online.de/em/datasheet/6130xx11121.pdf, componentlink2description="DigiKey Link", componentlink2url=https://www.digikey.com/en/products/detail/würth-elektronik/61300311121/4846825, Connector Type=Header, Contact Finish - Mating=Gold, Contact Length - Mating="0.236\" (6.00mm)", Contact Length - Post="0.118\" (3.00mm)", Contact Material="Copper Alloy", Contact Shape=Square, Contact Type="Male Pin", Fastening Type=Push-Pull, lastupdated="18.10.2024 13:43:15", Lifecycle Status=Active, Minimum Order=1, Mounting Type="Through Hole", Number of Positions=3, Number of Positions Loaded=All, Number of Rows=1, Overall Contact Length="0.454\" (11.54mm)", packaging=Bulk, Part Number=61300311121, Part Status=Active, partid=189, Pitch - Mating="0.100\" (2.54mm)", price=0.07, Row Spacing - Mating="-40°C ~ 105°C", series=WR-PHD, Shrouding=Unshrouded, Style="Board to Board or Cable", Supplier 1=DigiKey, Termination=Solder, Insulation Height="0.100\" (2.54mm)", Insulation Material="Polyamide (PA6T), Nylon 6T"
J6: "CONN RCPT 6POS 0.1 TIN PCB", Current Rating (Amps)="5.7A per Contact", manufacturer="Samtec Inc.", Material Flammability Rating="UL94 V-0", Operating Temperature="-55°C ~ 105°C", Supplier Part Number 1=SAM8865-ND, Insulation Color=Black, componentlink1description=Datasheet, componentlink1url=http://suddendocs.samtec.com/prints/ssw-s.pdf, componentlink2description="DigiKey Link", componentlink2url=https://www.digikey.com/en/products/detail/samtec-inc/SSW-106-03-T-S/1790202, Connector Type=Receptacle, Contact Finish - Mating=Tin, Contact Finish - Post=Tin, Contact Length - Post="0.394\" (10.00mm)", Contact Type=Forked, Fastening Type=Push-Pull, lastupdated="21.06.2022 15:09:22", Lifecycle Status=Active, Minimum Order=1, Mounting Type="Through Hole", Number of Positions=6, Number of Positions Loaded=All, Number of Rows=1, packaging=Bulk, Part Number=SSW-106-03-T-S, Part Status=Active, Pitch - Mating="0.100\" (2.54mm)", price=0.55, series=SSW, Style="Board to Board or Cable", Supplier 1=DigiKey, Termination=Solder, Insulation Height="0.335\" (8.51mm)"
J7: "CONN RCPT 4POS 0.1 TIN PCB", Current Rating (Amps)="5.7A per Contact", manufacturer="Samtec Inc.", Material Flammability Rating="UL94 V-0", Operating Temperature="-55°C ~ 105°C", Supplier Part Number 1=SSW-104-03-T-S-ND, Insulation Color=Black, componentlink2description="DigiKey Link", componentlink2url=http://digikey.com/product-detail/en/samtec-inc/SSW-104-03-T-S/SSW-104-03-T-S-ND/7874034, Connector Type=Receptacle, Contact Finish - Mating=Tin, Contact Finish - Post=Tin, Contact Type=Forked, Fastening Type=Push-Pull, lastupdated="21.06.2022 15:08:52", Lifecycle Status=Active, Minimum Order=1, Mounting Type="Through Hole", Number of Positions=4, Number of Positions Loaded=All, Number of Rows=1, packaging=Bulk, Part Number=SSW-104-03-T-S, Part Status=Active, price=0.83, series=SSW, Style="Board to Board or Cable", Supplier 1=DigiKey, Termination=Solder
L1: library part SRR6028-270Y, "FIXED IND 27UH 1.2A 130 MOHM SMD", Current - Saturation=1A, Current Rating (Amps)="1.2 A", DC Resistance (DCR)="130mOhm Max", Device Package=Nonstandard, Frequency - Self Resonant=19MHz, manufacturer="Bourns Inc.", Operating Temperature="-40°C ~ 125°C", Q @ Freq="9 @ 2.52MHz", Supplier Part Number 1=118-SRR6028-270YCT-ND, Tolerance=±30%, Inductance Frequency - Test="100 kHz", componentlink1description=Datasheet, componentlink1url=https://www.bourns.com/docs/Product-Datasheets/SRR6028.pdf, componentlink2description="DigiKey Link", componentlink2url=https://www.digikey.com/en/products/detail/bourns-inc/SRR6028-270Y/1970380, Height - Seated (Max)="0.118\" (3.00mm)", lastupdated="3.06.2024 20:02:38", Lifecycle Status=Active, Material - Core=Ferrite, Minimum Order=1, Mounting Type="Surface Mount", Package / Case=Nonstandard, packaging=TapeAndReel, Part Number=SRR6028-270Y, Part Status=Active, partid=53, price=0.31, series=SRR6028, Shielding=Shielded, Size / Dimension="0.268\" L x 0.268\" W (6.80mm x 6.80mm)", Supplier 1=DigiKey, Type="Drum Core, Wirewound", Inductance="27 µH"
Q1: "TRANS NPN 30V 1A SOT23", Current - Collector (Ic) (Max)=1A, Current - Collector Cutoff (Max)=100nA, DC Current Gain (hFE) (Min) @ Ic, Vce="300 @ 500mA, 5V", Frequency - Transition=100MHz, manufacturer="ON Semiconductor", Operating Temperature="-55°C ~ 150°C (TJ)", Package / Case="TO-236-3, SC-59, SOT-23-3", Power - Max=710mW, Supplier Device Package="SOT-23-3 (TO-236)", Supplier Part Number 1=MMBT489LT1GOSCT-ND, Voltage - Collector Emitter Breakdown (Max)=30V, componentlink1description=Datasheet, componentlink1url=http://www.onsemi.com/pub/Collateral/MMBT489LT1-D.PDF, componentlink2description="DigiKey Link", componentlink2url=http://digikey.com/product-detail/en/on-semiconductor/MMBT489LT1G/MMBT489LT1GOSCT-ND/2623471, lastupdated="3.06.2024 20:24:13", Lifecycle Status=Active, Minimum Order=1, Mounting Type="Surface Mount", packaging=TapeAndReel, Part Number=MMBT489LT1G, Part Status=Active, partid=152, price=0.09, series=-, Supplier 1=DigiKey, Transistor Type=NPN, Vce Saturation (Max) @ Ib, Ic="200mV @ 100mA, 1A"
R1: library part RC0402FR-07162KL, "RES 162K OHM 1% 1/16W 0402", Device Package="0402 (1005 Metric)", manufacturer=Yageo, Operating Temperature="-55°C ~ 155°C", Power (Watts)="0.063W, 1/16W", Supplier Device Package=0402, Supplier Part Number 1=YAG2370CT-ND, Temperature Coefficient=±100ppm/°C, Tolerance=±1%, componentlink1description=Datasheet, componentlink1url=https://www.yageo.com/upload/media/product/productsearch/datasheet/rchip/PYu-RC_Group_51_RoHS_L_10.pdf, componentlink2description="DigiKey Link", componentlink2url=https://www.digikey.com/en/products/detail/yageo/RC0402FR-07162KL/2345133, Composition="Thick Film", Features="Moisture Resistant", Height - Seated (Max)="0.016\" (0.40mm)", lastupdated="25.07.2024 09:18:19", Lifecycle Status=Active, Minimum Order=1, Number of Terminations=2, Package / Case="0402 (1005 Metric)", packaging=CutTape, Part Number=RC0402FR-07162KL, Part Status=Active, partid=2536, price=0.01, Resistance="100 kOhms", series=RC_L, Size / Dimension="0.039\" L x 0.020\" W (1.00mm x 0.50mm)", Supplier 1=DigiKey
R2: library part RC0402FR-0722K1L, "RES 22.1K OHM 1% 1/16W 0402", Device Package="0402 (1005 Metric)", manufacturer=Yageo, Operating Temperature="-55°C ~ 155°C", Power (Watts)="0.063W, 1/16W", Supplier Device Package=0402, Supplier Part Number 1=311-22.1KLRCT-ND, Temperature Coefficient=±100ppm/°C, Tolerance=±1%, componentlink1description=Datasheet, componentlink1url=https://www.yageo.com/upload/media/product/productsearch/datasheet/rchip/PYu-RC_Group_51_RoHS_L_10.pdf, componentlink2description="DigiKey Link", componentlink2url=https://www.digikey.com/en/products/detail/yageo/RC0402FR-0722K1L/726563, Composition="Thick Film", Features="Moisture Resistant", Height - Seated (Max)="0.016\" (0.40mm)", lastupdated="25.07.2024 09:18:19", Lifecycle Status=Active, Minimum Order=1, Number of Terminations=2, Package / Case="0402 (1005 Metric)", packaging=CutTape, Part Number=RC0402FR-0722K1L, Part Status=Active, partid=2641, price=0.01, Resistance="13.7 kOhms", series=RC_L, Size / Dimension="0.039\" L x 0.020\" W (1.00mm x 0.50mm)", Supplier 1=DigiKey
R3 R6 R7: library part RK73B1JTTDD391J, "RESISTOR", Device Package="0603 (1608 Metric)", manufacturer="KOA Speer Electronics, Inc.", Operating Temperature="-55°C ~ 155°C", Power (Watts)="0.125W, 1/8W", Ratings=AEC-Q200, Supplier Device Package=0603, Supplier Part Number 1=2019-RK73B1JTTDD391JCT-ND, Temperature Coefficient=±200ppm/°C, Tolerance=±5%, componentlink1description=Datasheet, componentlink1url=https://www.koaspeer.com/pdfs/RK73B.pdf, componentlink2description="DigiKey Link", componentlink2url=https://www.digikey.com/en/products/detail/koa-speer-electronics-inc/RK73B1JTTDD391J/21679924, Composition="Thick Film", Features="Automotive AEC-Q200", Height - Seated (Max)="0.022\" (0.55mm)", lastupdated="25.07.2024 09:42:51", Lifecycle Status=Active, Minimum Order=1, Number of Terminations=2, Package / Case="0603 (1608 Metric)", packaging=CutTape, Part Number=RK73B1JTTDD391J, partid=89761, price=0.01, Resistance="390 Ohms", series=RK73B, Size / Dimension="0.063\" L x 0.031\" W (1.60mm x 0.80mm)", Supplier 1=DigiKey
R4 R5: library part AT0603FRE0710KL, "RES SMD 10K OHM 1% 1/10W 0603", Device Package="0603 (1608 Metric)", manufacturer=Yageo, Operating Temperature="-55°C ~ 155°C", Power (Watts)="0.1W, 1/10W", Ratings=AEC-Q200, Supplier Device Package=0603, Supplier Part Number 1=YAG2122CT-ND, Temperature Coefficient=±50ppm/°C, Tolerance=±1%, componentlink1description=Datasheet, componentlink1url=http://www.yageo.com/documents/recent/PYu-AT_51_RoHS_L_5.pdf, componentlink2description="DigiKey Link", componentlink2url=https://www.digikey.com/en/products/detail/yageo/AT0603FRE0710KL/5138641, Composition="Thin Film", Features="Anti-Sulfur, Automotive AEC-Q200, Moisture Resistant", Height - Seated (Max)="0.022\" (0.55mm)", lastupdated="25.07.2024 09:19:22", Lifecycle Status=Active, Minimum Order=1, Number of Terminations=2, Package / Case="0603 (1608 Metric)", packaging=TapeAndReel, Part Number=AT0603FRE0710KL, Part Status=Active, partid=18757, price=0.02, Resistance="10 kOhms", series=AT, Size / Dimension="0.063\" L x 0.031\" W (1.60mm x 0.80mm)", Supplier 1=DigiKey
R8: library part ERJ-PB3B4752V, "RES SMD 47.5K OHM 0.1% 1/5W 0603", Device Package="0603 (1608 Metric)", manufacturer="Panasonic Electronic Components", Operating Temperature="-55°C ~ 155°C", Power (Watts)="0.2W, 1/5W", Ratings=AEC-Q200, Supplier Device Package=0603, Supplier Part Number 1=P20163CT-ND, Temperature Coefficient=±50ppm/°C, Tolerance=±0.1%, componentlink1description=Datasheet, componentlink1url=https://industrial.panasonic.com/cdbs/www-data/pdf/RDM0000/AOA0000C328.pdf, componentlink2description="DigiKey Link", componentlink2url=https://www.digikey.com/en/products/detail/panasonic-electronic-components/ERJ-PB3B4752V/6212946, Composition="Thick Film", Features="Automotive AEC-Q200, Pulse Withstanding", Height - Seated (Max)="0.022\" (0.55mm)", lastupdated="9.02.2024 20:43:36", Lifecycle Status=Active, Minimum Order=1, Number of Terminations=2, Package / Case="0603 (1608 Metric)", packaging=TapeAndReel, Part Number=ERJ-PB3B4752V, Part Status=Active, partid=4941, price=0.02, Resistance="47.5 kOhms", series=ERJ-PB3, Size / Dimension="0.063\" L x 0.031\" W (1.60mm x 0.80mm)", Supplier 1=DigiKey
R9: library part RNCS0603BKE10K0, "RES 10K OHM 0.1% 1/16W 0603", Device Package="0603 (1608 Metric)", manufacturer="Stackpole Electronics Inc", Operating Temperature="-55°C ~ 155°C", Power (Watts)="0.063W, 1/16W", Ratings=AEC-Q200, Supplier Device Package=0603, Supplier Part Number 1=RNCS0603BKE10K0CT-ND, Temperature Coefficient=±25ppm/°C, Tolerance=±0.1%, componentlink1description=Datasheet, componentlink1url=https://www.seielect.com/catalog/sei-rncs_rnch.pdf, componentlink2description="DigiKey Link", componentlink2url=https://www.digikey.com/en/products/detail/stackpole-electronics-inc/RNCS0603BKE10K0/1708836, Composition="Thin Film", Features="Anti-Corrosive, Automotive AEC-Q200, Moisture Resistant", Height - Seated (Max)="0.022\" (0.55mm)", lastupdated="9.02.2024 20:43:37", Lifecycle Status=Active, Minimum Order=1, Number of Terminations=2, Package / Case="0603 (1608 Metric)", packaging=TapeAndReel, Part Number=RNCS0603BKE10K0, Part Status=Active, partid=4838, price=0.06, Resistance="10 kOhms", series=RNCS, Size / Dimension="0.061\" L x 0.031\" W (1.55mm x 0.80mm)", Supplier 1=DigiKey
R10: library part CPF0603B2R21E1, "CPF 0603 2R21 0.1% 25PPM 1K RL", Device Package="0603 (1608 Metric)", manufacturer="TE Connectivity Passive Product", Operating Temperature="-55°C ~ 155°C", Power (Watts)="0.063W, 1/16W", Supplier Device Package=0603, Supplier Part Number 1=1712-CPF0603B2R21E1CT-ND, Temperature Coefficient=±25ppm/°C, Tolerance=±0.1%, componentlink1description=Datasheet, componentlink1url=https://www.te.com/commerce/DocumentDelivery/DDEController?Action=srchrtrv&DocNm=1773200&DocType=DS&DocLang=English, componentlink2description="DigiKey Link", componentlink2url=https://www.digikey.com/en/products/detail/te-connectivity-passive-product/CPF0603B2R21E1/14007137, Composition="Thin Film", Height - Seated (Max)="0.022\" (0.55mm)", lastupdated="9.02.2024 20:41:20", Lifecycle Status=Active, Minimum Order=1, Number of Terminations=2, Package / Case="0603 (1608 Metric)", packaging=TapeAndReel, Part Number=CPF0603B2R21E1, Part Status=Active, partid=62166, price=0.12, Resistance="2.21 Ohms", series=CPF, Size / Dimension="0.061\" L x 0.031\" W (1.55mm x 0.80mm)", Supplier 1=DigiKey
R11: library part ERJ-PB3D4750V, "RES SMD 475 OHM 0.5% 1/5W 0603", Device Package="0603 (1608 Metric)", manufacturer="Panasonic Electronic Components", Operating Temperature="-55°C ~ 155°C", Power (Watts)="0.2W, 1/5W", Ratings=AEC-Q200, Supplier Device Package=0603, Supplier Part Number 1=P20246CT-ND, Temperature Coefficient=±50ppm/°C, Tolerance=±0.5%, componentlink1description=Datasheet, componentlink1url=https://industrial.panasonic.com/cdbs/www-data/pdf/RDM0000/AOA0000C328.pdf, componentlink2description="DigiKey Link", componentlink2url=https://www.digikey.com/en/products/detail/panasonic-electronic-components/ERJ-PB3D4750V/6213029, Composition="Thick Film", Features="Automotive AEC-Q200, Pulse Withstanding", Height - Seated (Max)="0.022\" (0.55mm)", lastupdated="9.02.2024 20:43:28", Lifecycle Status=Active, Minimum Order=1, Number of Terminations=2, Package / Case="0603 (1608 Metric)", packaging=TapeAndReel, Part Number=ERJ-PB3D4750V, Part Status=Active, partid=7092, price=0.02, Resistance="475 Ohms", series=ERJ-PB3, Size / Dimension="0.063\" L x 0.031\" W (1.60mm x 0.80mm)", Supplier 1=DigiKey
S1: "SWITCH TACTILE SPST-NO 0.05A 12V", Contact Rating @ Voltage="0.05A @ 12VDC", manufacturer=C&K, Operating Force=160gf, Operating Temperature="-20°C ~ 60°C", Supplier Part Number 1=CKN9112CT-ND, Actuator Height off PCB, Vertical=4.30mm, Actuator Orientation="Top Actuated", Actuator Type=Standard, Circuit=SPST-NO, componentlink1description=Datasheet, componentlink1url=https://dznh3ojzb2azq.cloudfront.net/products/Tactile/PTS645/documents/datasheet.pdf, componentlink2description="DigiKey Link", componentlink2url=http://digikey.com/product-detail/en/c-k/PTS645SM43SMTR92-LFS/CKN9112CT-ND/1146934, Features="Blue Actuator", lastupdated="9.04.2020 09:59:00", Lifecycle Status=Active, Minimum Order=1, Mounting Type="Surface Mount", Outline="6.00mm x 6.00mm", packaging=TapeAndReel, Part Number="PTS645SM43SMTR92 LFS", Part Status=Active, price=0.09, series=PTS645, Supplier 1=DigiKey, Switch Function=Off-Mom, Termination Style="Gull Wing", Illumination=Non-Illuminated
U1: library part LMR51420XDDCR, "IC REG BUCK ADJ 2A SOT23-THIN \"Buck Switching Regulator IC Positive Adjustable 0.6V 1 Output 2A SOT-23-6 Thin,..."
U2: library part SN74HC163D, manufacturer="Texas Instruments", Manufacturer Part Number=SN74HC163DR, Supplier Part Number=296-31790-1-ND, Category=Counters, componentlink1description=https://datasheet.ciiva.com/15093/getdatasheetpartid-393963-15093910.pdf?src-supplier=Verical, componentlink1url=https://datasheet.ciiva.com/15093/getdatasheetpartid-393963-15093910.pdf?src-supplier=Verical, componentlink2description=https://datasheet.ciiva.com/41456/001016672-da-01-en-ic-4bit-bin-cnt-sn74hc163dr-soic-16-tid-41456966.pdf?src-supplier=Conrad, componentlink2url=https://datasheet.ciiva.com/41456/001016672-da-01-en-ic-4bit-bin-cnt-sn74hc163dr-soic-16-tid-41456966.pdf?src-supplier=Conrad, ComponentLink3Description=https://datasheet.ciiva.com/14296/sn54hc163-14296296.pdf?src-supplier=Avnet, ComponentLink3URL=https://datasheet.ciiva.com/14296/sn54hc163-14296296.pdf?src-supplier=Avnet, Pricing="1=0,27, 10=0,185, 25=0,164, 100=0,1408, 250=0,12964, 500=0,12294, 1000=0,11741 (USD)", RoHS=Yes, Stock=3569, Supplier=Digikey
Y1: library part NX5032GA-8MHZ-EXS00A-CG07039, "CRYSTAL 8.0000MHZ 18PF SMD", ESR (Equivalent Series Resistance)="300 Ohms", Frequency Stability=±30ppm, Frequency Tolerance=±20ppm, Load Capacitance=18pF, manufacturer="NDK America, Inc.", Operating Mode=Fundamental, Operating Temperature="-40°C ~ 85°C", Package / Case="2-SMD, No Lead", Supplier Part Number 1=644-1318-1-ND, componentlink1description=Datasheet, componentlink1url=//media.digikey.com/pdf/Data%20Sheets/NDK%20PDFs/NX5032GA-8MHz-EXS00A-CG07039.pdf, componentlink2description="DigiKey Link", componentlink2url=https://www.digikey.com/en/products/detail/ndk-america-inc/NX5032GA-8MHZ-EXS00A-CG07039/8275423, Frequency="8 MHz", Height - Seated (Max)="0.059\" (1.50mm)", lastupdated="3.06.2024 20:02:22", Lifecycle Status=Active, Minimum Order=1, Mounting Type="Surface Mount", packaging=TapeAndReel, Part Number=NX5032GA-8MHZ-EXS00A-CG07039, Part Status=Active, partid=609, price=0.32, series=NX5032GA, Size / Dimension="0.197\" L x 0.126\" W (5.00mm x 3.20mm)", Supplier 1=DigiKey, Type="MHz Crystal"

## Via types
v1: diameter 0.4, hole 0.2, Top Layer to Bottom Layer, 74 vias
v2: diameter 0.61, hole 0.305, Top Layer to Bottom Layer, 58 vias
v3: diameter 0.61/0.61 (per signal layer), hole 0.203, Top Layer to Bottom Layer, 1 vias

## Nets (pads, with @x,y where several pads share a name; then routed paths per layer and width w, separated by ;. In a path a pad name is that pad's centre, name@x,y a point inside that pad or via, vN(x,y) a via of type N, cw(c..) or ccw(c..) an arc to the next point about the centre after c; other vN are vias at no path point)
+3.3: C8.2 C9.2 C11.2 C12.2 C14.2 C15.2 C16.2 C18.2 C23.2 C24.2 D1.1 D2.1 IC1.2 IC1.4 IC2.1 IC2.9 IC2.24 IC2.36 IC2.48 J4.1 J5.1 J6.1 J6.2 R8.2 R10.2 U2.16 | length 34.4